# EAGLE board TDA2003_IMPRESION (EAGLE 7.2.0)
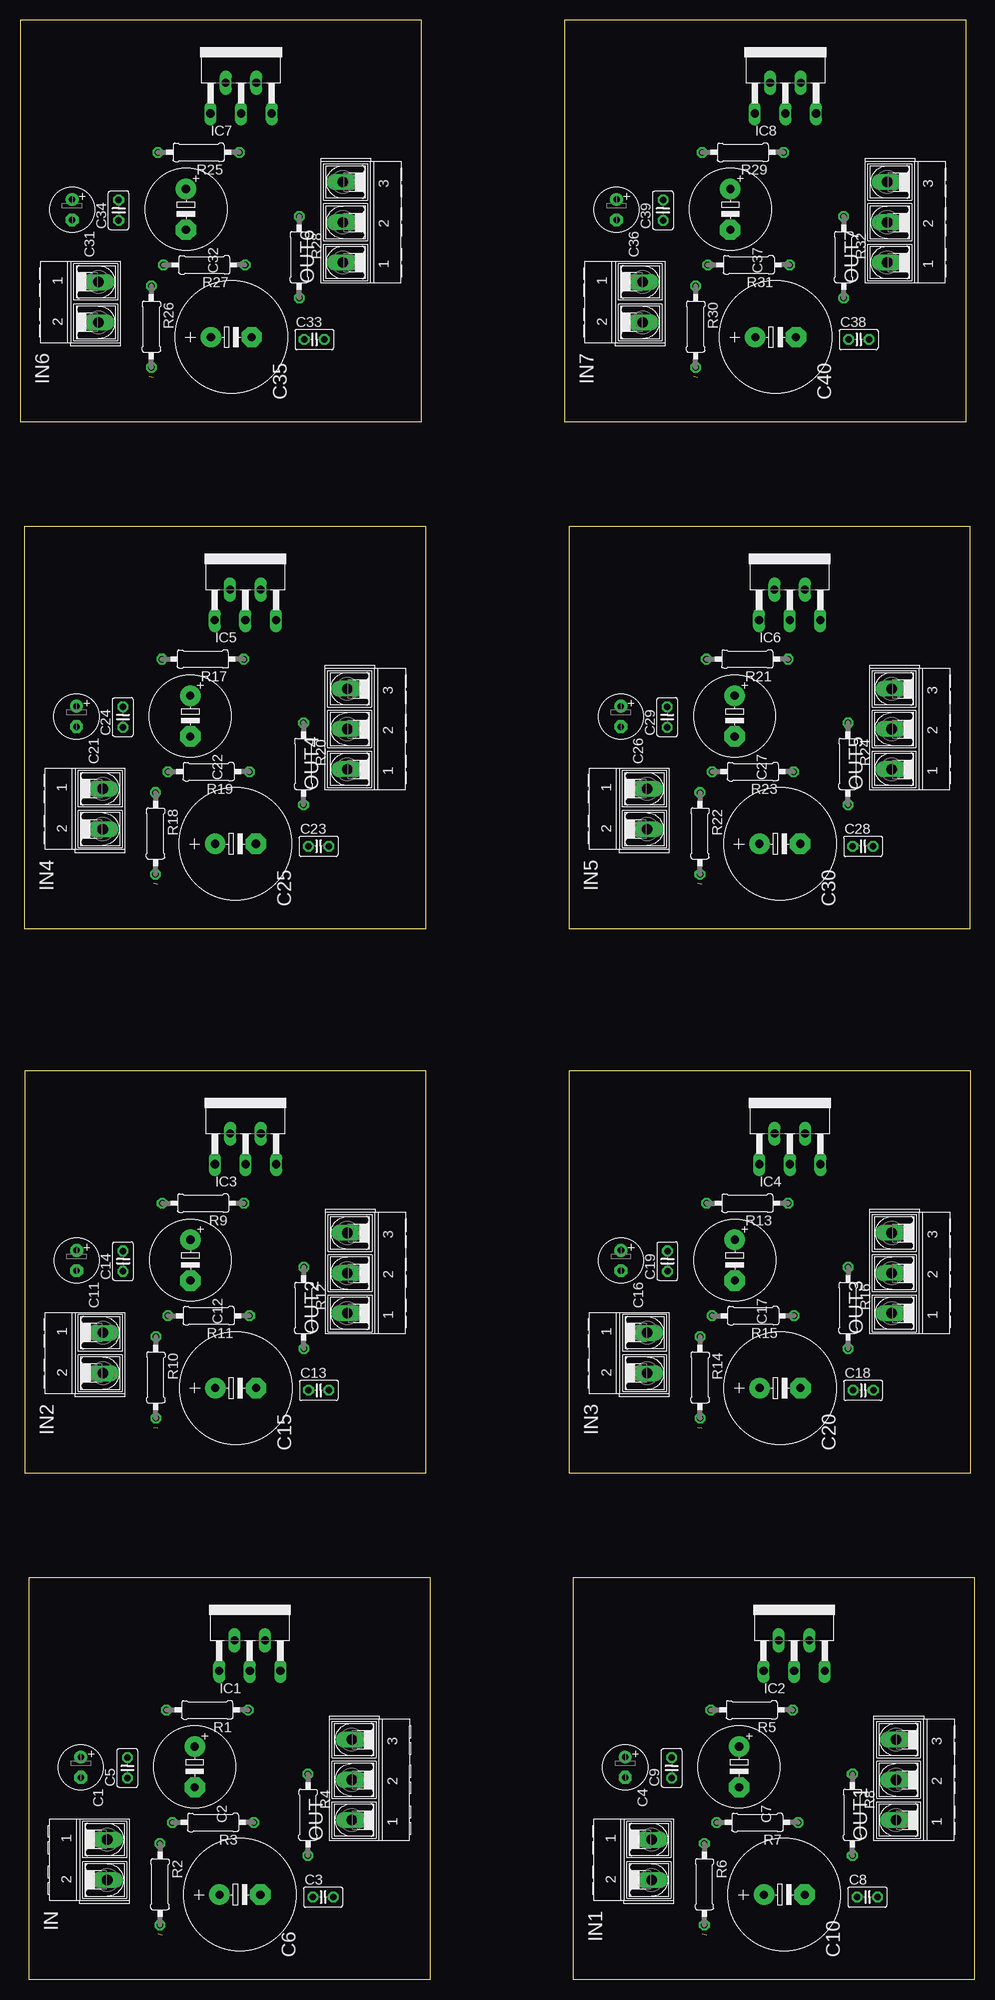
[diagram p0: board, top side]
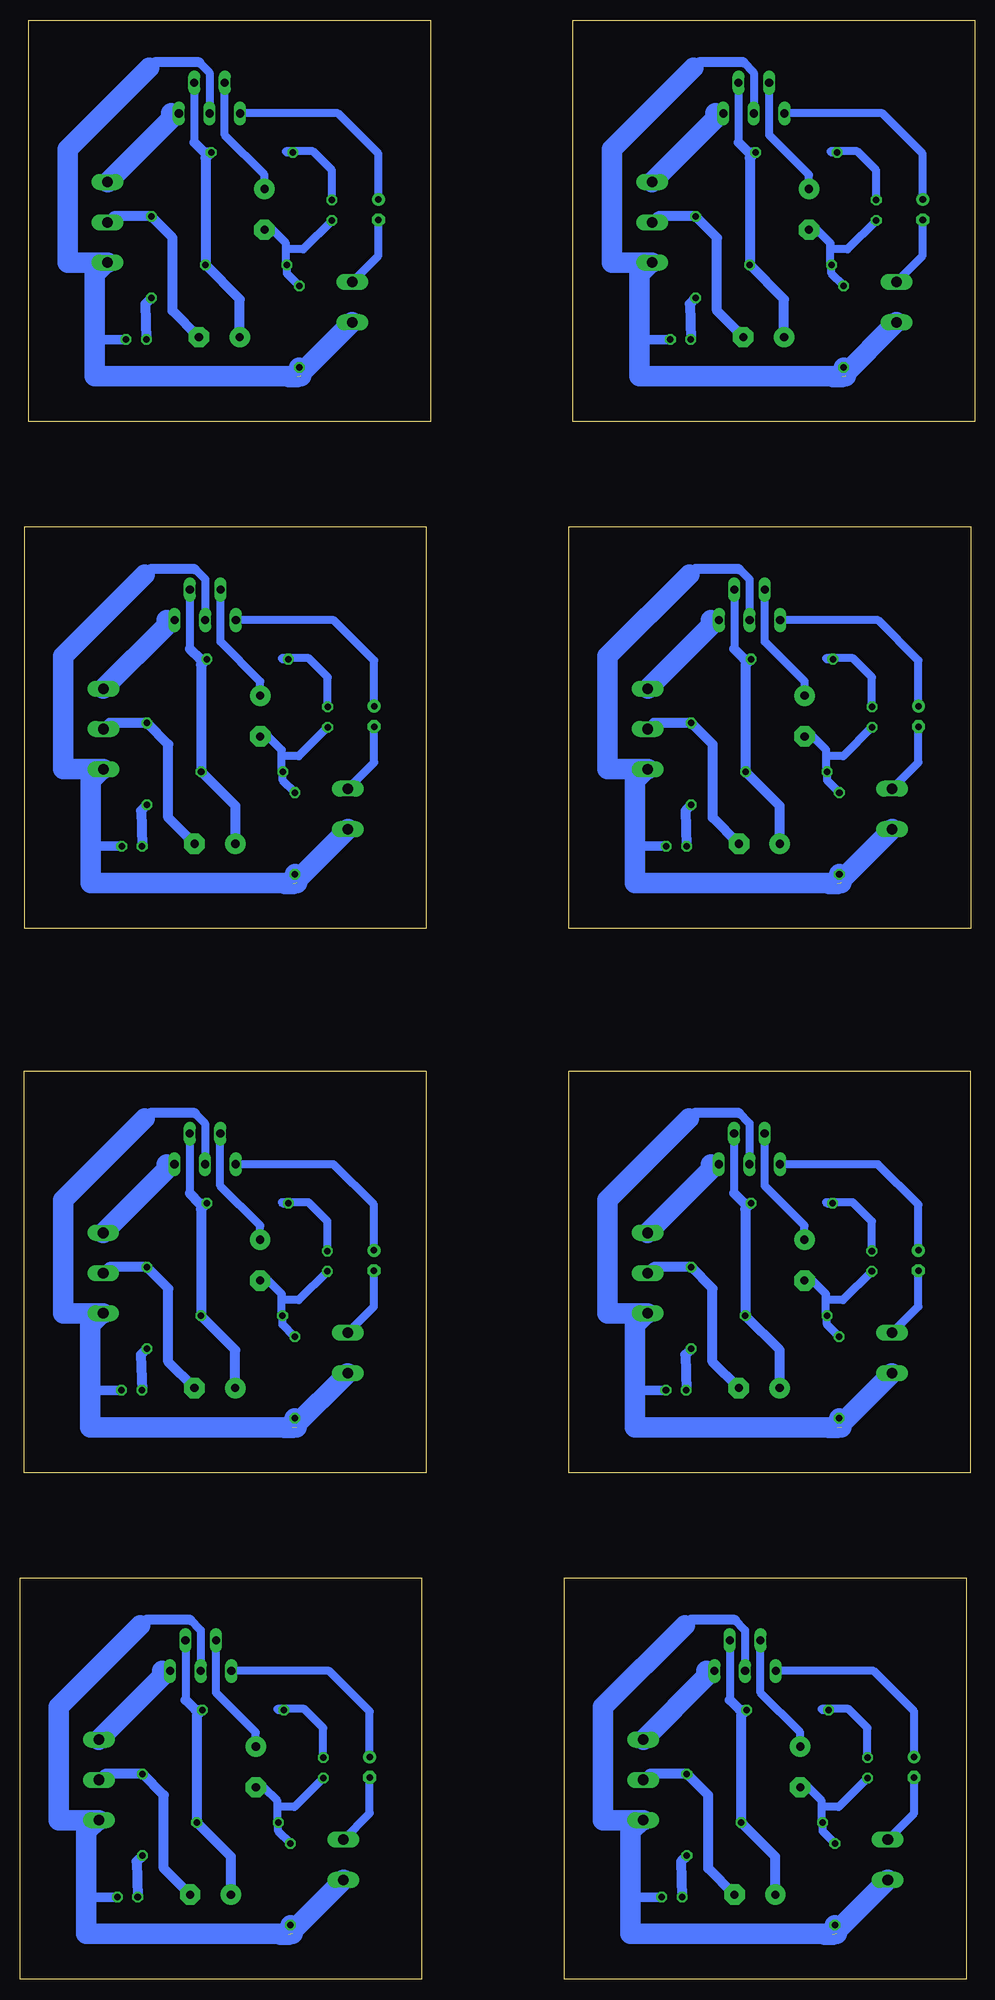
[diagram p1: board, bottom side, seen from below]

Size 118.85 x 243.85 mm. Coordinates in mm from the lower left corner, seen from the top.
Outline: 1.09,0 51.09,0 51.09,50 1.09,50 1.09,0
Outline: 68.85,0 118.85,0 118.85,50 68.85,50 68.85,0
Outline: 0.55,63.07 50.55,63.07 50.55,113.07 0.55,113.07 0.55,63.07
Outline: 68.32,63.07 118.32,63.07 118.32,113.07 68.32,113.07 68.32,63.07
Outline: 0.53,130.78 50.53,130.78 50.53,180.78 0.53,180.78 0.53,130.78
Outline: 68.3,130.78 118.3,130.78 118.3,180.78 68.3,180.78 68.3,130.78
Outline: 0,193.85 50,193.85 50,243.85 0,243.85 0,193.85
Outline: 67.77,193.85 117.77,193.85 117.77,243.85 67.77,243.85 67.77,193.85
Copper layers (1*16): Top 0.035mm / dielectric 1.5mm / Bottom 0.035mm
Design rules "default *": minimum track width 1mm, minimum drill 0.35mm, track to track 6mil, track to pad 6mil, pad to pad 6mil, via to via 6mil, smd to smd 6mil, copper to edge 40mil, drill to drill 6mil, minimum pad ring 10mil, minimum via ring 8mil, stop-mask expansion 4mil, vias tented up to drill 0mil, thermal gap 10mil

## Footprints (pad centres in the part's own frame; a part is rotated, then mirrored left to right if it is on the bottom)
E2,5-6 = drill 0.813 pad 1.6: + -1.27,0 | drill 0.813 pad 1.6 octagon: - 1.27,0
E5-10,5 = drill 1.016 pad 2.54: + -2.54,0 | drill 1.016 pad 2.54 octagon: - 2.54,0
C025-025X050 = drill 0.813 octagon: 1 -1.27,0; 2 1.27,0
E5-13 = drill 1.016 pad 2.54: + -2.54,0 | drill 1.016 pad 2.54 octagon: - 2.54,0
CB360 = drill 1.016 long: 1 -3.81,-8.255; 2 -1.905,-4.445; 3 0,-8.255; 4 1.905,-4.445; 5 3.81,-8.255
AK500/2-H = drill 1.321 long: 1 -2.515,0; 2 2.515,0
AK500/3-H = drill 1.321 long: 1 -5.004,0; 2 0,0; 3 5.004,0
0207/10 = drill 0.813 octagon: 1 -5.08,0; 2 5.08,0

## Placement (x,y rotation side)
C1  10uF  [E2,5-6]  7.57,26.4 270 top
C2  470uF  [E5-10,5]  21.74,26.45 270 top
C3  100nF  [C025-025X050]  37.72,10.25 0 top
C4  10uF  [E2,5-6]  75.33,26.4 270 top
C5  39nF  [C025-025X050]  13.36,26.32 90 top
C6  1000uF  [E5-13]  27.37,10.54 0 top
C7  470uF  [E5-10,5]  89.5,26.45 270 top
C8  100nF  [C025-025X050]  105.48,10.25 0 top
C9  39nF  [C025-025X050]  81.12,26.32 90 top
C10  1000uF  [E5-13]  95.14,10.54 0 top
C11  10uF  [E2,5-6]  7.03,89.47 270 top
C12  470uF  [E5-10,5]  21.21,89.52 270 top
C13  100nF  [C025-025X050]  37.18,73.32 0 top
C14  39nF  [C025-025X050]  12.82,89.39 90 top
C15  1000uF  [E5-13]  26.84,73.61 0 top
C16  10uF  [E2,5-6]  74.8,89.47 270 top
C17  470uF  [E5-10,5]  88.97,89.52 270 top
C18  100nF  [C025-025X050]  104.95,73.32 0 top
C19  39nF  [C025-025X050]  80.59,89.39 90 top
C20  1000uF  [E5-13]  94.61,73.61 0 top
C21  10uF  [E2,5-6]  7.01,157.19 270 top
C22  470uF  [E5-10,5]  21.18,157.23 270 top
C23  100nF  [C025-025X050]  37.16,141.03 0 top
C24  39nF  [C025-025X050]  12.8,157.11 90 top
C25  1000uF  [E5-13]  26.82,141.33 0 top
C26  10uF  [E2,5-6]  74.78,157.19 270 top
C27  470uF  [E5-10,5]  88.95,157.23 270 top
C28  100nF  [C025-025X050]  104.93,141.03 0 top
C29  39nF  [C025-025X050]  80.57,157.11 90 top
C30  1000uF  [E5-13]  94.59,141.33 0 top
C31  10uF  [E2,5-6]  6.48,220.25 270 top
C32  470uF  [E5-10,5]  20.65,220.3 270 top
C33  100nF  [C025-025X050]  36.63,204.1 0 top
C34  39nF  [C025-025X050]  12.27,220.17 90 top
C35  1000uF  [E5-13]  26.29,204.39 0 top
C36  10uF  [E2,5-6]  74.24,220.25 270 top
C37  470uF  [E5-10,5]  88.42,220.3 270 top
C38  100nF  [C025-025X050]  104.4,204.1 0 top
C39  39nF  [C025-025X050]  80.04,220.17 90 top
C40  1000uF  [E5-13]  94.05,204.39 0 top
IC1  TDA2003V  [CB360]  28.6,46.64 0 top
IC2  TDA2003V  [CB360]  96.36,46.64 0 top
IC3  TDA2003V  [CB360]  28.06,109.71 0 top
IC4  TDA2003V  [CB360]  95.83,109.71 0 top
IC5  TDA2003V  [CB360]  28.04,177.43 0 top
IC6  TDA2003V  [CB360]  95.81,177.43 0 top
IC7  TDA2003V  [CB360]  27.51,240.49 0 top
IC8  TDA2003V  [CB360]  95.28,240.49 0 top
IN  [AK500/2-H]  10.84,14.89 270 top
IN1  [AK500/2-H]  78.6,14.89 270 top
IN2  [AK500/2-H]  10.3,77.96 270 top
IN3  [AK500/2-H]  78.07,77.96 270 top
IN4  [AK500/2-H]  10.28,145.68 270 top
IN5  [AK500/2-H]  78.05,145.68 270 top
IN6  [AK500/2-H]  9.75,208.74 270 top
IN7  [AK500/2-H]  77.52,208.74 270 top
OUT  [AK500/3-H]  41.27,24.84 90 top
OUT1  [AK500/3-H]  109.04,24.84 90 top
OUT2  [AK500/3-H]  40.74,87.9 90 top
OUT3  [AK500/3-H]  108.51,87.9 90 top
OUT4  [AK500/3-H]  40.72,155.62 90 top
OUT5  [AK500/3-H]  108.49,155.62 90 top
OUT6  [AK500/3-H]  40.19,218.69 90 top
OUT7  [AK500/3-H]  107.95,218.69 90 top
R1  39  [0207/10]  23.31,33.54 180 top
R2  2.2  [0207/10]  17.42,11.84 270 top
R3  220  [0207/10]  24.02,19.53 180 top
R4  1  [0207/10]  35.84,20.5 270 top
R5  39  [0207/10]  91.07,33.54 180 top
R6  2.2  [0207/10]  85.19,11.84 270 top
R7  220  [0207/10]  91.79,19.53 180 top
R8  1  [0207/10]  103.61,20.5 270 top
R9  39  [0207/10]  22.77,96.6 180 top
R10  2.2  [0207/10]  16.89,74.91 270 top
R11  220  [0207/10]  23.49,82.6 180 top
R12  1  [0207/10]  35.31,83.57 270 top
R13  39  [0207/10]  90.54,96.6 180 top
R14  2.2  [0207/10]  84.65,74.91 270 top
R15  220  [0207/10]  91.25,82.6 180 top
R16  1  [0207/10]  103.08,83.57 270 top
R17  39  [0207/10]  22.75,164.32 180 top
R18  2.2  [0207/10]  16.87,142.63 270 top
R19  220  [0207/10]  23.47,150.31 180 top
R20  1  [0207/10]  35.29,151.28 270 top
R21  39  [0207/10]  90.52,164.32 180 top
R22  2.2  [0207/10]  84.63,142.63 270 top
R23  220  [0207/10]  91.23,150.31 180 top
R24  1  [0207/10]  103.06,151.28 270 top
R25  39  [0207/10]  22.22,227.39 180 top
R26  2.2  [0207/10]  16.33,205.69 270 top
R27  220  [0207/10]  22.93,213.38 180 top
R28  1  [0207/10]  34.76,214.35 270 top
R29  39  [0207/10]  89.99,227.39 180 top
R30  2.2  [0207/10]  84.1,205.69 270 top
R31  220  [0207/10]  90.7,213.38 180 top
R32  1  [0207/10]  102.52,214.35 270 top

## Library data of the parts
C1-C40 = rcl; SPICEPREFIX: C
IC1-IC8 = linear
IN IN1-IN7 OUT OUT1-OUT7 = con-ptr500; OC_FARNELL: unknown; OC_NEWARK: unknown
R1-R32 = rcl; SPICEPREFIX: R

## Nets
GND: C3.2 IC1.3 IN.2 OUT.1 R2.2
GND1: C8.2 IC2.3 IN1.2 OUT1.1 R6.2
GND2: C13.2 IC3.3 IN2.2 OUT2.1 R10.2
GND3: C18.2 IC4.3 IN3.2 OUT3.1 R14.2
GND4: C23.2 IC5.3 IN4.2 OUT4.1 R18.2
GND5: C28.2 IC6.3 IN5.2 OUT5.1 R22.2
GND6: C33.2 IC7.3 IN6.2 OUT6.1 R26.2
GND7: C38.2 IC8.3 IN7.2 OUT7.1 R30.2
N$1: C1.+ IC1.1
N$2: C1.- IN.1
N$3: C6.+ IC1.4 R1.1 R3.1
N$4: C6.- OUT.2 R4.1
N$5: C2.- C5.1 R2.1 R3.2
N$6: C3.1 R4.2
N$7: C2.+ IC1.2
N$8: C5.2 R1.2
N$9: C4.+ IC2.1
N$10: C4.- IN1.1
N$11: C10.+ IC2.4 R5.1 R7.1
N$12: C10.- OUT1.2 R8.1
N$13: C7.- C9.1 R6.1 R7.2
N$14: C8.1 R8.2
N$15: C7.+ IC2.2
N$16: C9.2 R5.2
N$17: C11.+ IC3.1
N$18: C11.- IN2.1
N$19: C15.+ IC3.4 R9.1 R11.1
N$20: C15.- OUT2.2 R12.1
N$21: C12.- C14.1 R10.1 R11.2
N$22: C13.1 R12.2
N$23: C12.+ IC3.2
N$24: C14.2 R9.2
N$25: C16.+ IC4.1
N$26: C16.- IN3.1
N$27: C20.+ IC4.4 R13.1 R15.1
N$28: C20.- OUT3.2 R16.1
N$29: C17.- C19.1 R14.1 R15.2
N$30: C18.1 R16.2
N$31: C17.+ IC4.2
N$32: C19.2 R13.2
N$33: C21.+ IC5.1
N$34: C21.- IN4.1
N$35: C25.+ IC5.4 R17.1 R19.1
N$36: C25.- OUT4.2 R20.1
N$37: C22.- C24.1 R18.1 R19.2
N$38: C23.1 R20.2
N$39: C22.+ IC5.2
N$40: C24.2 R17.2
N$41: C26.+ IC6.1
N$42: C26.- IN5.1
N$43: C30.+ IC6.4 R21.1 R23.1
N$44: C30.- OUT5.2 R24.1
N$45: C27.- C29.1 R22.1 R23.2
N$46: C28.1 R24.2
N$47: C27.+ IC6.2
N$48: C29.2 R21.2
N$49: C31.+ IC7.1
N$50: C31.- IN6.1
N$51: C35.+ IC7.4 R25.1 R27.1
N$52: C35.- OUT6.2 R28.1
N$53: C32.- C34.1 R26.1 R27.2
N$54: C33.1 R28.2
N$55: C32.+ IC7.2
N$56: C34.2 R25.2
N$57: C36.+ IC8.1
N$58: C36.- IN7.1
N$59: C40.+ IC8.4 R29.1 R31.1
N$60: C40.- OUT7.2 R32.1
N$61: C37.- C39.1 R30.1 R31.2
N$62: C38.1 R32.2
N$63: C37.+ IC8.2
N$64: C39.2 R29.2
VCC: IC1.5 OUT.3
VCC1: IC2.5 OUT1.3
VCC2: IC3.5 OUT2.3
VCC3: IC4.5 OUT3.3
VCC4: IC5.5 OUT4.3
VCC5: IC6.5 OUT5.3
VCC6: IC7.5 OUT6.3
VCC7: IC8.5 OUT7.3

## Tracks (layer width: path | path; a pad name or v marks a point on that pad's centre or on a via)
GND  (1 unrouted)
  Bottom 1: 41.44,19.83 OUT.1 41.28,19.76 | IC1.3 28.6,43.47 29.87,44.74 | 42.64,10.25 42.86,10.03
  Bottom 1.2: C3.2 42.64,10.25
  Bottom 1.27: 29.87,44.74 35.45,44.74 36.11,44.08
  Bottom 2.54: IN.2 17.67,5.55 18.68,5.55 | 41.44,19.83 42.86,18.41 42.86,10.03 42.86,5.66 17.17,5.66 17.17,6.52 R2.2 | OUT.1 46.27,19.83 46.27,33.91 36.11,44.08
GND1  (1 unrouted)
  Bottom 1: 109.2,19.83 OUT1.1 109.04,19.76 | IC2.3 96.36,43.47 97.63,44.74 | 110.41,10.25 110.63,10.03
  Bottom 1.2: C8.2 110.41,10.25
  Bottom 1.27: 97.63,44.74 103.22,44.74 103.88,44.08
  Bottom 2.54: IN1.2 85.43,5.55 86.45,5.55 | 109.2,19.83 110.63,18.41 110.63,10.03 110.63,5.66 84.94,5.66 84.94,6.52 R6.2 | OUT1.1 114.04,19.83 114.04,33.91 103.88,44.08
GND2  (1 unrouted)
  Bottom 1: 40.9,82.9 OUT2.1 40.74,82.82 | IC3.3 28.06,106.53 29.33,107.8 | 42.11,73.32 42.33,73.1
  Bottom 1.2: C13.2 42.11,73.32
  Bottom 1.27: 29.33,107.8 34.92,107.8 35.58,107.14
  Bottom 2.54: IN2.2 17.14,68.61 18.15,68.61 | 40.9,82.9 42.33,81.47 42.33,73.1 42.33,68.72 16.64,68.72 16.64,69.58 R10.2 | OUT2.1 45.74,82.9 45.74,96.98 35.58,107.14
GND3  (1 unrouted)
  Bottom 1: 108.67,82.9 OUT3.1 108.51,82.82 | IC4.3 95.83,106.53 97.1,107.8 | 109.88,73.32 110.09,73.1
  Bottom 1.2: C18.2 109.88,73.32
  Bottom 1.27: 97.1,107.8 102.68,107.8 103.34,107.14
  Bottom 2.54: IN3.2 84.9,68.61 85.91,68.61 | 108.67,82.9 110.09,81.47 110.09,73.1 110.09,68.72 84.41,68.72 84.41,69.58 R14.2 | OUT3.1 113.51,82.9 113.51,96.98 103.34,107.14
GND4  (1 unrouted)
  Bottom 1: 40.88,150.62 OUT4.1 40.72,150.54 | IC5.3 28.04,174.25 29.31,175.52 | 42.09,141.03 42.31,140.82
  Bottom 1.2: C23.2 42.09,141.03
  Bottom 1.27: 29.31,175.52 34.9,175.52 35.56,174.86
  Bottom 2.54: IN4.2 17.11,136.33 18.13,136.33 | 40.88,150.62 42.31,149.19 42.31,140.82 42.31,136.44 16.62,136.44 16.62,137.3 R18.2 | OUT4.1 45.72,150.62 45.72,164.7 35.56,174.86
GND5  (1 unrouted)
  Bottom 1: 108.65,150.62 OUT5.1 108.49,150.54 | IC6.3 95.81,174.25 97.08,175.52 | 109.86,141.03 110.07,140.82
  Bottom 1.2: C28.2 109.86,141.03
  Bottom 1.27: 97.08,175.52 102.66,175.52 103.32,174.86
  Bottom 2.54: IN5.2 84.88,136.33 85.89,136.33 | 108.65,150.62 110.07,149.19 110.07,140.82 110.07,136.44 84.39,136.44 84.39,137.3 R22.2 | OUT5.1 113.49,150.62 113.49,164.7 103.32,174.86
GND6  (1 unrouted)
  Bottom 1: 40.35,213.68 OUT6.1 40.19,213.61 | IC7.3 27.51,237.32 28.78,238.59 | 41.56,204.1 41.77,203.88
  Bottom 1.2: C33.2 41.56,204.1
  Bottom 1.27: 28.78,238.59 34.36,238.59 35.02,237.93
  Bottom 2.54: IN6.2 16.58,199.4 17.59,199.4 | 40.35,213.68 41.77,212.26 41.77,203.88 41.77,199.51 16.09,199.51 16.09,200.37 R26.2 | OUT6.1 45.19,213.68 45.19,227.76 35.02,237.93
GND7  (1 unrouted)
  Bottom 1: 108.12,213.68 OUT7.1 107.95,213.61 | IC8.3 95.28,237.32 96.55,238.59 | 109.32,204.1 109.54,203.88
  Bottom 1.2: C38.2 109.32,204.1
  Bottom 1.27: 96.55,238.59 102.13,238.59 102.79,237.93
  Bottom 2.54: IN7.2 84.35,199.4 85.36,199.4 | 108.12,213.68 109.54,212.26 109.54,203.88 109.54,199.51 83.85,199.51 83.85,200.37 R30.2 | OUT7.1 112.95,213.68 112.95,227.76 102.79,237.93
N$1
  Bottom 1: C1.+ 7.57,33.36 12.6,38.39 IC1.1
N$2
  Bottom 1: IN.1 7.57,20.68 C1.-
N$3
  Bottom 1: IC1.4 30.5,34.79
  Bottom 1.27: 30.5,34.79 29.25,33.54 R1.1 29.1,32.82 R3.1 24.84,15.26 C6.+
N$4
  Bottom 1.27: C6.- 33.18,13.81 33.18,22.92 R4.1 40.53,25.58 OUT.2
N$5
  Bottom 1: R2.1 18.94,18.45 R3.2 19.06,19.65 19.06,21.47 | 19.06,21.47 19.06,22.22 20.74,23.91 C2.- | C5.1 16.94,21.47 19.06,21.47
N$6
  Bottom 1.27: R4.2 35.84,15.4 36.58,14.67 C3.1
N$7
  Bottom 1: IC1.2 26.69,35.7 21.74,30.74 C2.+
N$8
  Bottom 1: C5.2 13.36,31.29 15.72,33.66 19.06,33.66 18.93,33.54 R1.2
N$9
  Bottom 1: C4.+ 75.33,33.36 80.36,38.39 IC2.1
N$10
  Bottom 1: IN1.1 75.33,20.68 C4.-
N$11
  Bottom 1: IC2.4 98.27,34.79
  Bottom 1.27: 98.27,34.79 97.01,33.54 R5.1 96.87,32.82 R7.1 92.6,15.26 C10.+
N$12
  Bottom 1.27: C10.- 100.95,13.81 100.95,22.92 R8.1 108.3,25.58 OUT1.2
N$13
  Bottom 1: R6.1 86.71,18.45 R7.2 86.82,19.65 86.82,21.47 | 86.82,21.47 86.82,22.22 88.51,23.91 C7.- | C9.1 84.71,21.47 86.82,21.47
N$14
  Bottom 1.27: R8.2 103.61,15.4 104.34,14.67 C8.1
N$15
  Bottom 1: IC2.2 94.46,35.7 89.5,30.74 C7.+
N$16
  Bottom 1: C9.2 81.12,31.29 83.49,33.66 86.82,33.66 86.7,33.54 R5.2
N$17
  Bottom 1: C11.+ 7.03,96.42 12.06,101.45 IC3.1
N$18
  Bottom 1: IN2.1 7.03,83.75 C11.-
N$19
  Bottom 1: IC3.4 29.97,97.86
  Bottom 1.27: 29.97,97.86 28.72,96.6 R9.1 28.57,95.89 R11.1 24.3,78.33 C15.+
N$20
  Bottom 1.27: C15.- 32.65,76.88 32.65,85.98 R12.1 40,88.65 OUT2.2
N$21
  Bottom 1: R10.1 18.41,81.51 R11.2 18.52,82.71 18.52,84.54 | 18.52,84.54 18.52,85.29 20.21,86.98 C12.- | C14.1 16.41,84.54 18.52,84.54
N$22
  Bottom 1.27: R12.2 35.31,78.47 36.04,77.74 C13.1
N$23
  Bottom 1: IC3.2 26.16,98.76 21.21,93.81 C12.+
N$24
  Bottom 1: C14.2 12.82,94.36 15.19,96.73 18.52,96.73 18.4,96.6 R9.2
N$25
  Bottom 1: C16.+ 74.8,96.42 79.83,101.45 IC4.1
N$26
  Bottom 1: IN3.1 74.8,83.75 C16.-
N$27
  Bottom 1: IC4.4 97.73,97.86
  Bottom 1.27: 97.73,97.86 96.48,96.6 R13.1 96.33,95.89 R15.1 92.07,78.33 C20.+
N$28
  Bottom 1.27: C20.- 100.42,76.88 100.42,85.98 R16.1 107.76,88.65 OUT3.2
N$29
  Bottom 1: R14.1 86.17,81.51 R15.2 86.29,82.71 86.29,84.54 | 86.29,84.54 86.29,85.29 87.98,86.98 C17.- | C19.1 84.17,84.54 86.29,84.54
N$30
  Bottom 1.27: R16.2 103.08,78.47 103.81,77.74 C18.1
N$31
  Bottom 1: IC4.2 93.92,98.76 88.97,93.81 C17.+
N$32
  Bottom 1: C19.2 80.59,94.36 82.96,96.73 86.29,96.73 86.17,96.6 R13.2
N$33
  Bottom 1: C21.+ 7.01,164.14 12.04,169.17 IC5.1
N$34
  Bottom 1: IN4.1 7.01,151.46 C21.-
N$35
  Bottom 1: IC5.4 29.95,165.57
  Bottom 1.27: 29.95,165.57 28.69,164.32 R17.1 28.55,163.6 R19.1 24.28,146.05 C25.+
N$36
  Bottom 1.27: C25.- 32.63,144.59 32.63,153.7 R20.1 39.98,156.36 OUT4.2
N$37
  Bottom 1: R18.1 18.39,149.23 R19.2 18.5,150.43 18.5,152.25 | 18.5,152.25 18.5,153.01 20.19,154.69 C22.- | C24.1 16.39,152.25 18.5,152.25
N$38
  Bottom 1.27: R20.2 35.29,146.19 36.02,145.46 C23.1
N$39
  Bottom 1: IC5.2 26.14,166.48 21.19,161.53 C22.+
N$40
  Bottom 1: C24.2 12.8,162.08 15.17,164.44 18.5,164.44 18.38,164.32 R17.2
N$41
  Bottom 1: C26.+ 74.78,164.14 79.81,169.17 IC6.1
N$42
  Bottom 1: IN5.1 74.78,151.46 C26.-
N$43
  Bottom 1: IC6.4 97.71,165.57
  Bottom 1.27: 97.71,165.57 96.46,164.32 R21.1 96.31,163.6 R23.1 92.05,146.05 C30.+
N$44
  Bottom 1.27: C30.- 100.4,144.59 100.4,153.7 R24.1 107.74,156.36 OUT5.2
N$45
  Bottom 1: R22.1 86.15,149.23 R23.2 86.27,150.43 86.27,152.25 | 86.27,152.25 86.27,153.01 87.96,154.69 C27.- | C29.1 84.15,152.25 86.27,152.25
N$46
  Bottom 1.27: R24.2 103.06,146.19 103.79,145.46 C28.1
N$47
  Bottom 1: IC6.2 93.9,166.48 88.95,161.53 C27.+
N$48
  Bottom 1: C29.2 80.57,162.08 82.94,164.44 86.27,164.44 86.15,164.32 R21.2
N$49
  Bottom 1: C31.+ 6.48,227.21 11.51,232.24 IC7.1
N$50
  Bottom 1: IN6.1 6.48,214.53 C31.-
N$51
  Bottom 1: IC7.4 29.41,228.64
  Bottom 1.27: 29.41,228.64 28.16,227.39 R25.1 28.02,226.67 R27.1 23.75,209.11 C35.+
N$52
  Bottom 1.27: C35.- 32.1,207.66 32.1,216.77 R28.1 39.45,219.43 OUT6.2
N$53
  Bottom 1: R26.1 17.86,212.3 R27.2 17.97,213.5 17.97,215.32 | 17.97,215.32 17.97,216.07 19.66,217.76 C32.- | C34.1 15.85,215.32 17.97,215.32
N$54
  Bottom 1.27: R28.2 34.76,209.25 35.49,208.52 C33.1
N$55
  Bottom 1: IC7.2 25.6,229.54 20.65,224.59 C32.+
N$56
  Bottom 1: C34.2 12.27,225.14 14.64,227.51 17.97,227.51 17.85,227.39 R25.2
N$57
  Bottom 1: C36.+ 74.24,227.21 79.28,232.24 IC8.1
N$58
  Bottom 1: IN7.1 74.24,214.53 C36.-
N$59
  Bottom 1: IC8.4 97.18,228.64
  Bottom 1.27: 97.18,228.64 95.93,227.39 R29.1 95.78,226.67 R31.1 91.51,209.11 C40.+
N$60
  Bottom 1.27: C40.- 99.86,207.66 99.86,216.77 R32.1 107.21,219.43 OUT7.2
N$61
  Bottom 1: R30.1 85.62,212.3 R31.2 85.74,213.5 85.74,215.32 | 85.74,215.32 85.74,216.07 87.42,217.76 C37.- | C39.1 83.62,215.32 85.74,215.32
N$62
  Bottom 1.27: R32.2 102.52,209.25 103.26,208.52 C38.1
N$63
  Bottom 1: IC8.2 93.37,229.54 88.42,224.59 C37.+
N$64
  Bottom 1: C39.2 80.04,225.14 82.4,227.51 85.74,227.51 85.61,227.39 R29.2
VCC
  Bottom 1.27: 33.38,38.39 IC1.5 | OUT.3 37.18,33.93
  Bottom 2.54: OUT.3 33.38,37.73 33.38,38.39
VCC1
  Bottom 1.27: 101.15,38.39 IC2.5 | OUT1.3 104.95,33.93
  Bottom 2.54: OUT1.3 101.15,37.73 101.15,38.39
VCC2
  Bottom 1.27: 32.85,101.45 IC3.5 | OUT2.3 36.65,97
  Bottom 2.54: OUT2.3 32.85,100.8 32.85,101.45
VCC3
  Bottom 1.27: 100.62,101.45 IC4.5 | OUT3.3 104.42,97
  Bottom 2.54: OUT3.3 100.62,100.8 100.62,101.45
VCC4
  Bottom 1.27: 32.83,169.17 IC5.5 | OUT4.3 36.63,164.72
  Bottom 2.54: OUT4.3 32.83,168.51 32.83,169.17
VCC5
  Bottom 1.27: 100.6,169.17 IC6.5 | OUT5.3 104.4,164.72
  Bottom 2.54: OUT5.3 100.6,168.51 100.6,169.17
VCC6
  Bottom 1.27: 32.3,232.24 IC7.5 | OUT6.3 36.1,227.78
  Bottom 2.54: OUT6.3 32.3,231.58 32.3,232.24
VCC7
  Bottom 1.27: 100.06,232.24 IC8.5 | OUT7.3 103.86,227.78
  Bottom 2.54: OUT7.3 100.06,231.58 100.06,232.24